# EAGLE board sob (EAGLE 6.6.0)
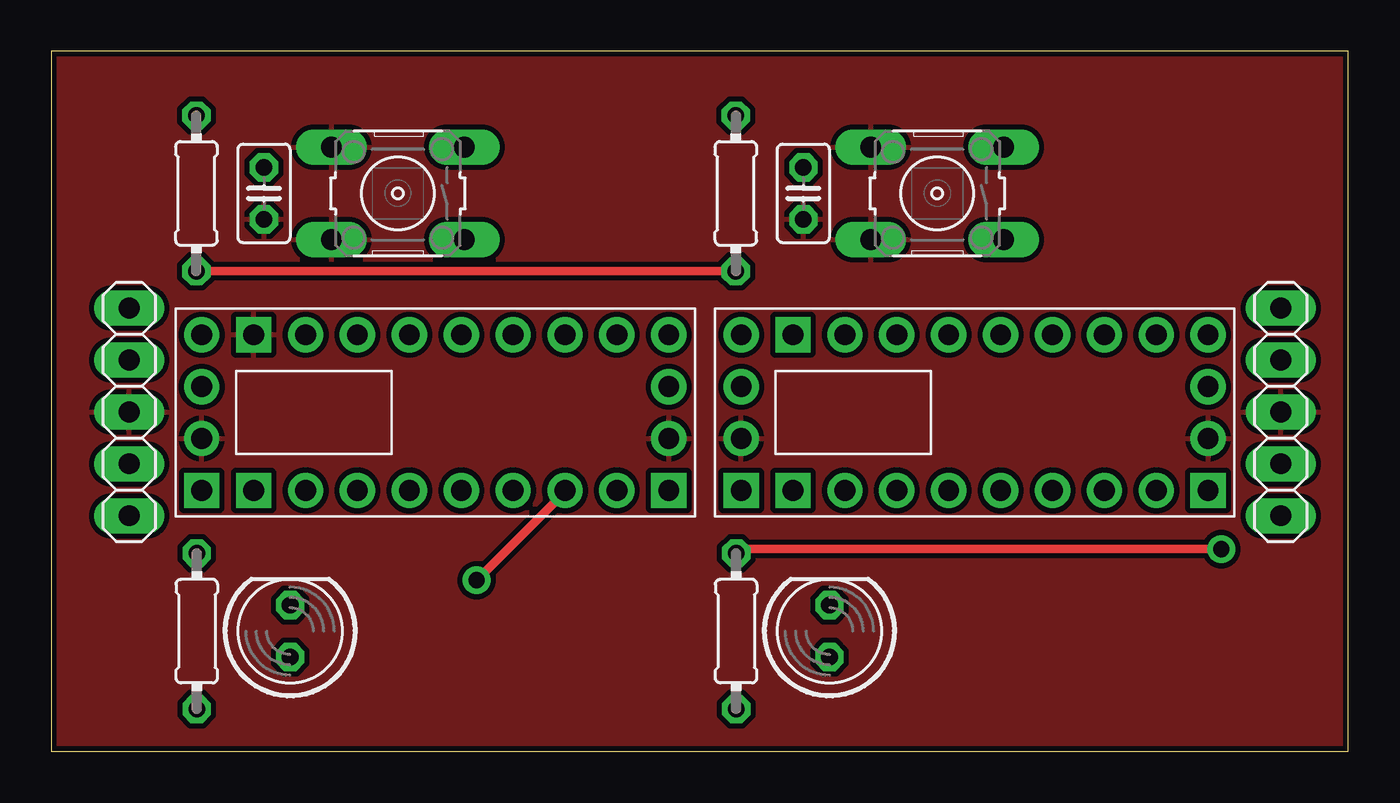
[diagram p0: board, top side]
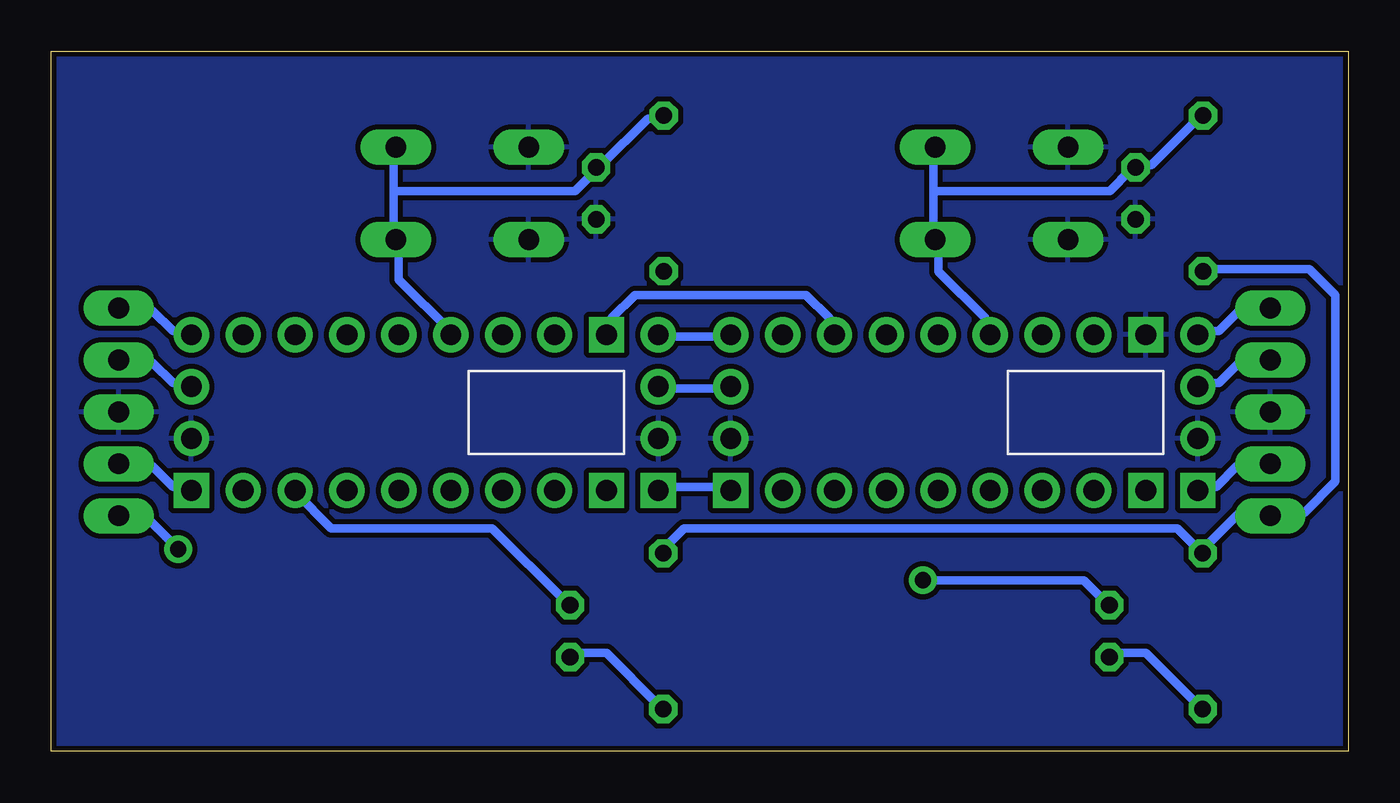
[diagram p1: board, bottom side, seen from below]

Size 63.5 x 34.29 mm. Coordinates in mm from the lower left corner, seen from the top.
Outline: 0,0 63.5,0 63.5,34.29 0,34.29 0,0
Copper layers (1*16): Top 0.035mm / dielectric 1.5mm / Bottom 0.035mm
Design rules "default *": minimum track width 10mil, minimum drill 24mil, track to track 10mil, track to pad 10mil, pad to pad 10mil, via to via 10mil, smd to smd 10mil, copper to edge 10mil, drill to drill 8mil, minimum pad ring 10mil, minimum via ring 8mil, stop-mask expansion 4mil, vias tented up to drill 0mil, thermal gap 10mil

## Footprints (pad centres in the part's own frame; a part is rotated, then mirrored left to right if it is on the bottom)
C025-025X050 = drill 0.813 octagon: 1 -1.27,0; 2 1.27,0
CARRIER_DIP = drill 1.016: GND_0 -11.43,-1.27; GND_1 11.43,-1.27; PTA3 -3.81,-3.81; PTA4 -1.27,-3.81; PTA5 1.27,-3.81; PTA6 3.81,-3.81; PTA7 8.89,-3.81; PTA8 3.81,3.81; PTA9 1.27,3.81; PTA12 -3.81,3.81; PTB1 8.89,3.81; PTB2 6.35,3.81; PTB5 -1.27,3.81; PTB7 -6.35,-3.81; PTB10 6.35,-3.81; PTB13 -6.35,3.81; SCL_0 -11.43,1.27; SCL_1 11.43,1.27; SDA_0 -11.43,3.81; SDA_1 11.43,3.81 | drill 1.016 square: PTB0 -8.89,3.81; PTB6 -8.89,-3.81; VCC_0 -11.43,-3.81; VCC_1 11.43,-3.81
LED5MM = drill 0.813 octagon: A -1.27,0; K 1.27,0
0204/7 = drill 0.813 octagon: 1 -3.81,0; 2 3.81,0
B3F-10XX = drill 1.016 long: 1 -3.251,2.261; 2 3.251,2.261; 3 -3.251,-2.261; 4 3.251,-2.261
1X05 = drill 1.016 long: 1 -5.08,0; 2 -2.54,0; 3 0,0; 4 2.54,0; 5 5.08,0

## Placement (x,y rotation side)
C545  100nf  [C025-025X050]  10.42,27.32 90 top
C622  100nf  [C025-025X050]  36.82,27.32 90 top
CPU221  [CARRIER_DIP]  18.81,16.59 0 top
CPU610  [CARRIER_DIP]  45.21,16.59 0 top
LED552  [LED5MM]  11.7,5.89 90 top
LED629  [LED5MM]  38.1,5.89 90 top
R439  1k  [0204/7]  7.11,27.32 270 top
R597  1k  [0204/7]  7.13,5.89 90 top
R621  1k  [0204/7]  33.51,27.32 270 top
R630  1k  [0204/7]  33.53,5.89 90 top
SW339  [B3F-10XX]  16.97,27.32 180 top
SW620  [B3F-10XX]  43.37,27.32 180 top
SWD_L16  [1X05]  3.82,16.62 90 top
SWD_R219  [1X05]  60.19,16.62 90 top

## Library data of the parts
C545 C622 R439 R597 R621 R630 = rcl
CPU221 CPU610 = modrob
LED552 LED629 = led
SW339 SW620 = switch-omron
SWD_L16 SWD_R219 = pinhead

## Nets
GND655: C545.1 C622.1 CPU221.GND_0 CPU221.GND_1 CPU221.PTB0 CPU610.GND_0 CPU610.GND_1 SW339.2 SW339.4 SW620.2 SW620.4 SWD_L16.3 SWD_R219.3
IO550: C545.2 CPU221.PTB5 R439.1 SW339.1 SW339.3
IO603: CPU221.PTB10 LED552.K
IO627: C622.2 CPU610.PTB5 R621.1 SW620.1 SW620.3
IO636: CPU610.PTB10 LED629.K
SCL01649: CPU221.SCL_1 CPU610.SCL_0
SCL_L643: CPU221.SCL_0 SWD_L16.4
SCL_R646: CPU610.SCL_1 SWD_R219.4
SDA01650: CPU221.SDA_1 CPU610.SDA_0
SDA_L644: CPU221.SDA_0 SWD_L16.5
SDA_R647: CPU610.SDA_1 SWD_R219.5
TOK01651: CPU221.PTB2 CPU610.PTB0
UP598: LED552.A R597.1
UP631: LED629.A R630.1
V3653: R439.2 R597.2 R621.2 R630.2 SWD_L16.1 SWD_R219.1
VCC01648: CPU221.VCC_1 CPU610.VCC_0
VCC_L642: CPU221.VCC_0 SWD_L16.2
VCC_R645: CPU610.VCC_1 SWD_R219.2

## Tracks (layer width: path | path; a pad name or v marks a point on that pad's centre or on a via)
GND655
  pour Top (isolate 0.254): 0,0 63.5,0 63.5,34.29 0,34.29
  pour Bottom (isolate 0.254): 63.5,0 0,0 0,34.29 63.5,34.29
IO550
  Bottom 0.406: R439.1 7.37,30.99 9.65,28.7 10.41,28.7 C545.2 10.67,28.45 11.68,27.43 20.32,27.43 | CPU221.PTB5 17.78,21.21 20.07,23.5 20.07,24.89 SW339.1 20.32,25.15 20.32,27.43 | 20.32,27.43 20.32,29.46 SW339.3
IO603  (via drill 0.8)
  Top 0.406: v20.83,8.38 25.15,12.7 CPU221.PTB10
  Bottom 0.406: v20.83,8.38 12.95,8.38 11.94,7.37 LED552.K
IO627
  Bottom 0.406: R621.1 33.53,30.99 34.29,30.99 36.58,28.7 C622.2 36.83,28.45 37.85,27.43 46.74,27.43 | CPU610.PTB5 43.94,20.57 46.48,23.11 46.48,24.89 SW620.1 46.74,25.15 46.74,27.43 | 46.74,27.43 46.74,29.46 SW620.3
IO636
  Bottom 0.406: LED629.K 38.35,7.37 41.91,10.92 49.78,10.92 51.56,12.7 CPU610.PTB10
SCL01649
  Bottom 0.406: CPU221.SCL_1 30.48,17.78 33.53,17.78 CPU610.SCL_0
SCL_L643
  Bottom 0.406: CPU221.SCL_0 7.37,18.03 6.35,18.03 5.33,19.05 4.06,19.05 SWD_L16.4
SCL_R646
  Bottom 0.406: CPU610.SCL_1 56.64,18.03 57.53,18.03 58.55,19.05 59.94,19.05 SWD_R219.4
SDA01650
  Bottom 0.406: CPU221.SDA_1 30.48,20.32 33.53,20.32 CPU610.SDA_0
SDA_L644
  Bottom 0.406: CPU221.SDA_0 7.37,20.57 6.35,20.57 5.33,21.59 4.06,21.59 SWD_L16.5
SDA_R647
  Bottom 0.406: CPU610.SDA_1 56.64,20.57 57.53,20.57 58.55,21.59 59.94,21.59 SWD_R219.5
TOK01651
  Bottom 0.406: CPU221.PTB2 25.4,21.21 26.54,22.35 34.92,22.35 36.07,21.21 CPU610.PTB0
UP598
  Bottom 0.406: R597.1 7.37,2.29 9.91,4.83 11.68,4.83 LED552.A
UP631
  Bottom 0.406: R630.1 33.78,2.29 36.32,4.83 38.1,4.83 LED629.A
V3653  (via drill 0.8)
  Top 0.406: v57.28,9.91 33.78,9.91 R630.2 | R621.2 R439.2
  Bottom 0.406: R439.2 7.11,23.62 1.91,23.62 0.64,22.35 0.64,13.21 2.16,11.68 3.81,11.68 SWD_L16.1 4.06,11.68 5.33,11.68 7.11,9.91 R597.2 7.37,9.91 8.38,10.92 32.51,10.92 33.53,9.91 R630.2 | v57.28,9.91 58.8,11.43 59.94,11.43 SWD_R219.1
VCC01648
  Bottom 0.406: CPU221.VCC_1 30.48,12.95 33.53,12.95 CPU610.VCC_0
VCC_L642
  Bottom 0.406: CPU221.VCC_0 7.37,12.95 6.48,12.95 5.46,13.97 4.06,13.97 SWD_L16.2
VCC_R645
  Bottom 0.406: CPU610.VCC_1 56.64,12.95 57.53,12.95 58.55,13.97 59.94,13.97 SWD_R219.2